# Altium PCB uku20710_proc_mount.PcbDoc (part 3 of 3)
Units mm, origin at the board's own origin, x right, y up, seen from the top; angles counter-clockwise.
Board outline 354.7 x 156.7 mm, 4 copper layers (Top Layer, MidLayer1, MidLayer2, Bottom Layer); 269 components, 535 nets, 989 pads, 687 vias.
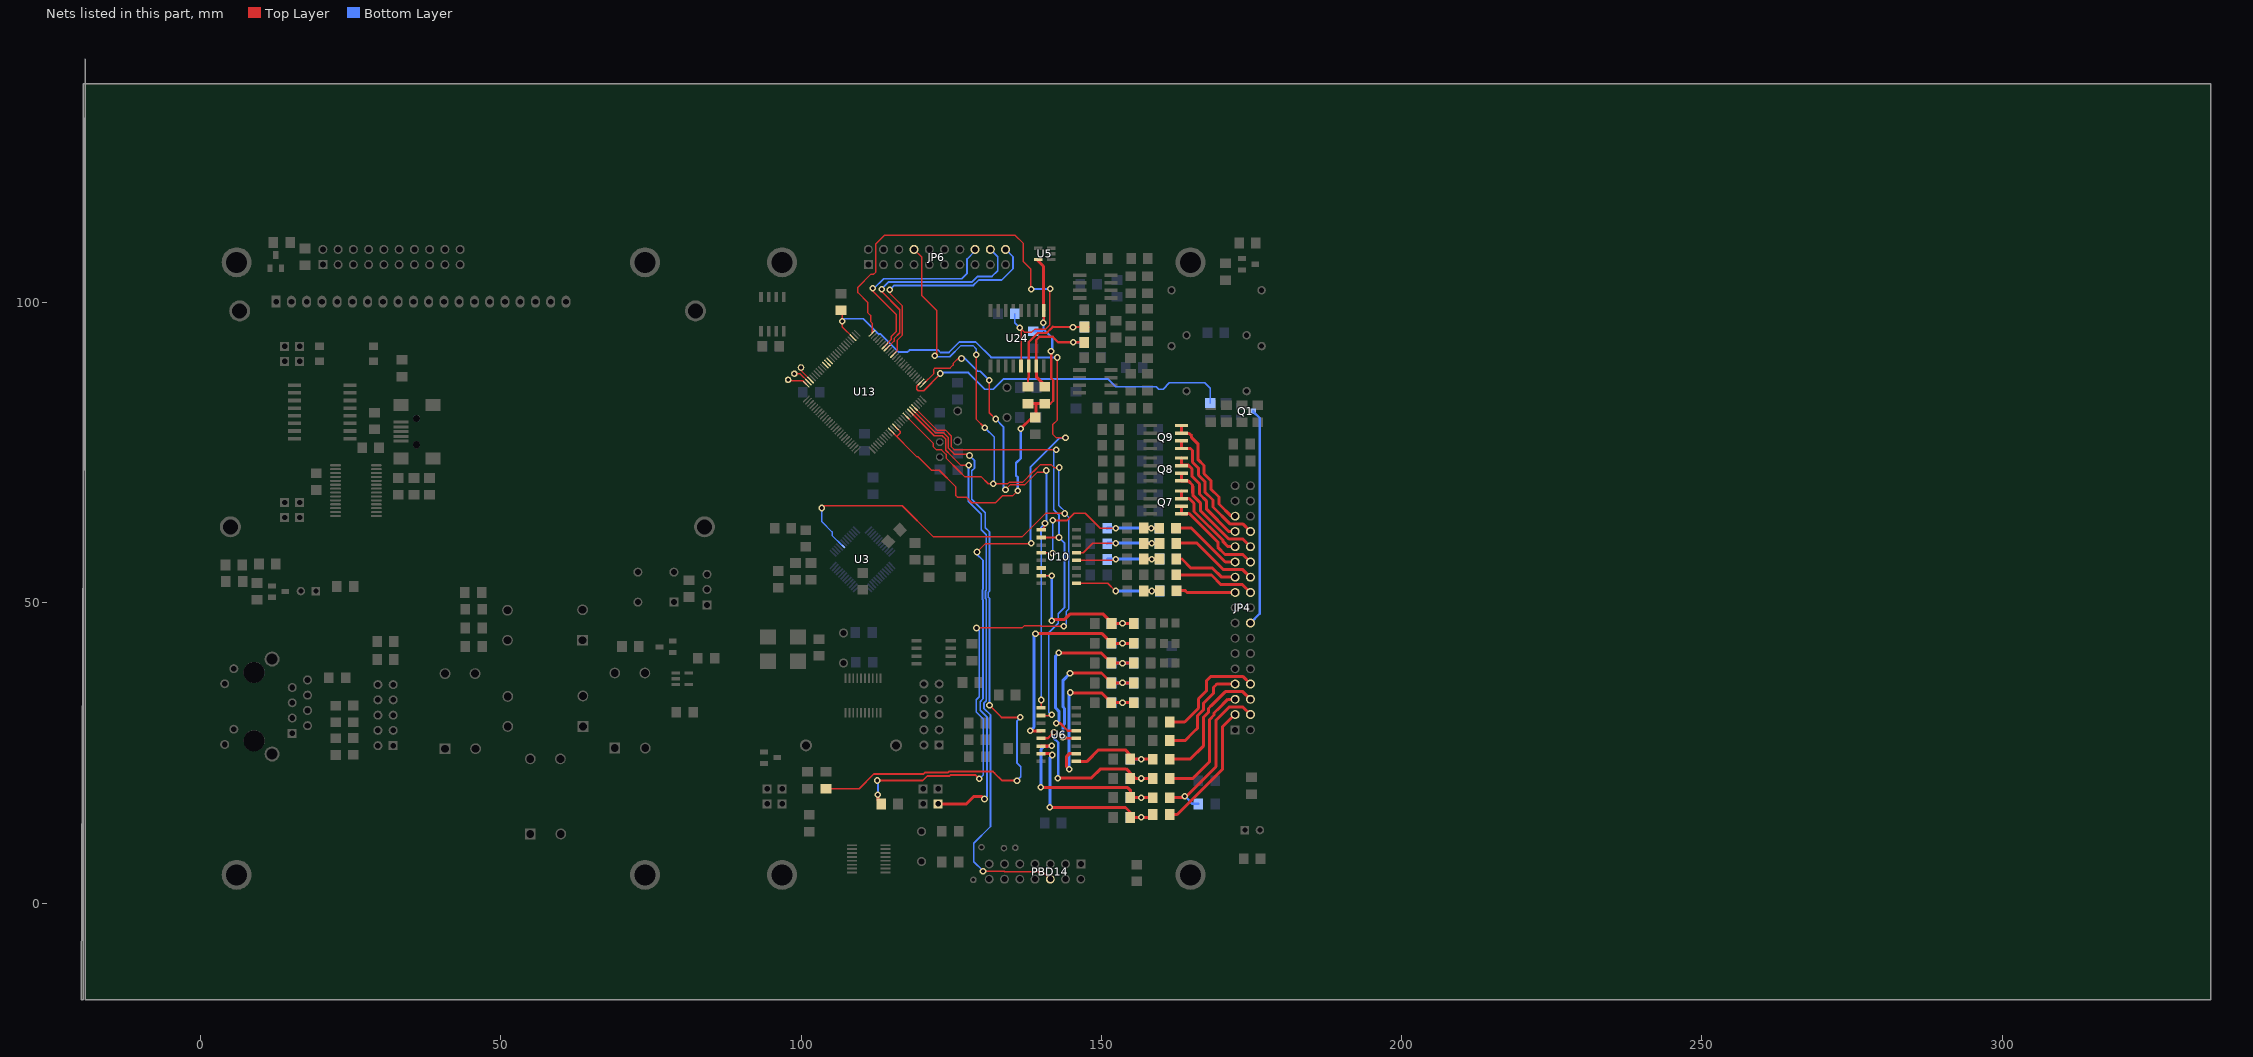
[diagram p3: the nets of this part, all layers, seen from the top]

## Via types
v1: diameter 1.1, hole 0.6, Top Layer to Bottom Layer, 508 vias
v2: diameter 1.1, hole 0.7, Top Layer to Bottom Layer, 105 vias
v3: diameter 1.2, hole 0.7, Top Layer to Bottom Layer, 58 vias
v4: diameter 1.5, hole 1, Top Layer to Bottom Layer, 12 vias
v5: diameter 1.27, hole 0.711, Top Layer to Bottom Layer, 3 vias
v6: diameter 1.2, hole 0.6, Top Layer to Bottom Layer, 1 vias

## Nets (pads, with @x,y where several pads share a name; then routed paths per layer and width w, separated by ;. In a path a pad name is that pad's centre, name@x,y a point inside that pad or via, vN(x,y) a via of type N, cw(c..) or ccw(c..) an arc to the next point about the centre after c; other vN are vias at no path point) (continued)
P1_25: JP6.19 U13.39 | length 29.9
  Top Layer w0.3: U13.39@115.701,90.984 116.974,92.257 v1(116.952,93.372) ; v1(123.904,93.172) 125.124,93.172 126.274,94.323 126.274,101.85 128.674,104.25 131.984,104.25 JP6.19@134.034,106.3
  Bottom Layer w0.3: v1(116.952,93.372) 123.704,93.372 v1(123.904,93.172)
P1_25: 
P1_25: 
P1_25: 
P1_25: 
P1_25: 
P1_26: JP6.20 U13.40 | length 38
  Top Layer w0.25: v1(114.774,102.15) 114.774,101.5 116.874,99.4 116.874,94.6 116.024,93.75 116.024,92.014 U13.40@115.347,91.337
  Bottom Layer w0.3: v1(114.774,102.15) 115.474,102.85 128.674,102.85 129.574,103.75 133.374,103.75 135.274,105.65 135.274,107.6 JP6.20@134.034,108.84
P1_27: JP6.18 U13.43 | length 36.9
  Top Layer w0.25: v1@113.324,101.9 116.424,98.8 116.424,94.95 115.474,94 115.474,93.586 U13.43@114.287,92.398 ; U13.43@114.124,92.25 U13.43@114.28,92.405
  Bottom Layer w0.3: v1@113.324,101.9 113.324,102.176 113.324,102.2 113.351,102.227 114.524,103.4 128.424,103.4 129.374,104.35 131.774,104.35 132.724,105.3 132.724,107.61 JP6.18@131.494,108.84
  other v1: 113.403,102.176
P1_28: JP6.16 U13.44 | length 33.2
  Top Layer w0.25: v1@111.874,102.1 111.874,101.95 115.874,97.95 115.874,95.2 115.804,95.13 115.804,95.122 115.002,94.319 115.002,93.82 U13.44@113.933,92.751
  Bottom Layer w0.3: v1@111.874,102.1 112.05,102.276 113.724,103.95 126.724,103.95 127.624,104.85 127.624,107.25 128.954,108.58 JP6.16@128.954,108.84
  other v1: 111.951,102.375
P1_29: JP6.14 U13.45 | length 31.9
  Top Layer w0.25: v1@110.3,102.375 110.3,102.225 110.526,102 112.501,100.024 112.701,100.024 115.352,97.373 115.352,95.323 114.552,94.523 114.552,94.077 U13.45@113.58,93.105
  Bottom Layer w0.3: v1@110.501,102.375 112.901,104.775 124.204,104.775 125.104,105.675 125.104,107.276 126.414,108.586 JP6.14@126.414,108.84
  other v1: 110.601,102.075
P1_29: 
P1_29: 
P1_29: 
P1_29: 
P1_30: U6.10 U10.10 U13.21 | length 78.8
  Top Layer w0.25: U13.21@118.883,82.498 122.631,78.75 124.024,78.75 124.974,77.8 124.974,76 125.474,75.5 v1(142.474,75.5) ; U6.10@139.954,31.218 139.972,31.2 141.702,31.2 v1@141.76,31.258
  Top Layer w0.3: U10.10@139.999,60.875 v1@142.95,60.875
  Bottom Layer w0.3: v1@141.76,31.258 141.224,31.793 141.224,44.976 142.81,46.562 142.81,48.198 143.874,49.262 143.874,59.901 v1@142.96,60.815 ; v1(142.474,75.5) 142.074,75.1 142.074,65.502 142.924,64.652 v1@142.924,60.815
  other v1: 141.76,31.358 142.935,60.875
P1_31: 
P1_31: 
P1_31: 
P1_31: 
P1_31: 
P1_31: 
P1_31: 
P1_31: 
P1_31: 
P1_31: 
P1_31: 
P1_31: 
P1_31: 
P1_31: R22.1 U13.20 | length 108.1
  Top Layer w0.25: U13.20@118.529,82.145 122.405,78.27 123.755,78.27 124.505,77.519 124.505,75.769 125.557,74.718 127.832,74.718 v1(128.032,74.518)
  Top Layer w0.3: R22.1@104.133,19.042 109.666,19.042 112.129,21.505 120.43,21.505 120.68,21.755 124.481,21.755 124.631,21.906 131.933,21.906 132.183,21.655 ; v1(131.357,32.908) 133.358,30.908 v1(136.508,30.908) ; 132.183,21.655 133.457,20.381 v1(135.934,20.381)
  Bottom Layer w0.3: v1(128.032,74.518) 128.882,73.667 128.882,72.443 128.406,71.967 128.406,67.217 130.657,64.966 130.657,62.516 131.357,61.815 131.357,51.963 131.157,51.763 131.157,50.913 131.357,50.713 v1(131.357,32.908) ; v1(135.934,20.381) 136.558,21.005 136.558,22.706 135.958,23.306 135.958,30.358 v1(136.508,30.908)
P2_0: U13.75 X13.1 | length 3.3
  Top Layer w0.25: X13.1@97.825,87.121 97.975,86.971 100.268,86.971 U13.75@100.852,86.387
P2_1: U13.74 X14.1 | length 2.9
  Top Layer w0.25: X14.1@98.875,88.15 99.797,88.15 U13.74@101.205,86.741
P2_2: U13.73 X15.1 | length 2.7
  Top Layer w0.25: X15.1@99.972,89.171 99.972,88.682 U13.73@101.559,87.095
P2_7: U13.66
P2_8: U13.65
P2_9: U13.64
P2_10: R9.2 U13.53 X20.1 | length 142.3
  Top Layer w0.25: R9.2@106.7,98.724 106.874,98.549 v1(106.874,96.9) 106.824,96.85 106.824,95.971 U13.53@108.63,94.166 ; v1(129.274,58.45) 130.624,59.8 v1@138.274,59.8 ; v1(142.674,90.85) 142.674,80.45 141.874,79.65 141.874,78.1 142.524,77.45 v1(144.024,77.45)
  Top Layer w0.5: X20.1@122.822,16.5 127.502,16.5 128.706,17.704 130.107,17.704 v3(130.507,17.304)
  Bottom Layer w0.3: v1(106.874,96.9) 107.274,97.3 110.324,97.3 112.851,94.773 113.201,94.773 116.202,91.772 117.752,91.772 118.052,92.072 122.804,92.072 123.204,91.672 124.604,91.672 126.355,93.422 129.055,93.422 131.628,90.85 v1(142.674,90.85) ; v1(129.274,58.45) 129.274,58.05 130.274,57.05 130.274,52.238 130.197,52.161 130.197,50.515 130.274,50.438 130.274,34 129.824,33.55 129.824,32.1 130.924,31 130.924,17.722 v3(130.507,17.304) ; v1@138.274,59.8 138.174,59.9 138.174,72.55 143.074,77.45 v1(144.024,77.45)
  other v1: 138.309,59.915
P2_13: R97.1 U13.50 U24.5 | length 74.9
  Top Layer w0.25: U13.50@111.812,94.873 111.812,96.565 111.552,96.824 111.552,97.847 111.124,98.275 111.124,99.975 109.452,101.648 109.452,102.55 111.628,104.726 112.102,104.726 112.452,105.076 112.452,109.778 113.853,111.178 135.658,111.178 137.009,109.828 137.009,106.777 138.259,105.526 v1@138.259,102.276 ; v1(136.408,95.824) v1@136.609,95.623 ; U24.5@136.609,89.425 v1@136.609,95.623 ; v1(141.46,102.276) 141.36,102.176 141.36,96.224 140.659,95.524 138.859,95.524 138.409,95.074 137.159,95.074 v1@136.609,95.623
  Bottom Layer w0.3: R97.1@135.57,98.118 135.57,96.662 v1(136.408,95.824) ; v1(138.309,102.226) v1@141.41,102.226
P3_25: R84.1 U13.27 | length 57.5
  Top Layer w0.25: U13.27@119.944,86.741 119.254,86.051 119.254,85.571 119.504,85.321 120.404,85.321 123.155,88.072 v1(123.155,88.172)
  Bottom Layer w0.3: v1(123.155,88.172) 123.305,88.322 127.856,88.322 130.607,85.571 132.007,85.571 133.708,87.272 151.062,87.272 152.362,85.972 159.164,85.972 159.564,85.571 160.264,85.571 161.315,86.622 167.216,86.622 168.113,85.725 R84.1@168.113,83.268
P3_26: U6.9 U10.9 U13.26 | length 84.3
  Top Layer w0.25: U13.26@120.297,86.387 122.103,88.194 122.103,88.921 122.253,89.071 124.804,89.071 125.304,89.571 125.304,89.821 126.355,90.872 126.705,90.872 v1@126.905,90.872 ; v1(131.324,87.05) 131.324,81.65 v1(132.374,80.6) ; v1@133.89,68.85 v1(134.024,68.85) 134.791,69.616 137.185,69.616 139.335,71.767 v1@140.835,71.767 ; U6.9@139.954,32.488 139.954,33.48 v1@139.974,33.5 ; U10.9@139.999,62.145 140.609,62.755 v1(140.609,63.216)
  Bottom Layer w0.3: v1@126.905,90.872 127.053,90.872 129.374,88.55 129.824,88.55 v1(131.324,87.05) ; v1(132.374,80.6) 133.674,79.3 133.674,69.05 133.949,68.775 v1@134.074,68.65 ; 139.959,61.315 139.959,62.566 140.835,63.442 v1@140.835,71.767 ; v1@139.974,33.5 139.974,33.808 139.974,61.9
  other v1: 140.009,33.808 140.835,72.017 126.705,90.672
PB1: 
PB1: 
PB2: 
PB2: 
PB3: 
PB3: 
PE6: 
PE6: 
PE7: 
PQ3: 
PQ4: 
PQ5: 
PQ6: 
PROG0: 
PROG1: 
PROG1: 
PROG1: 
PWM1: 
PWM2: 
REL1: 
REL1: JP4.24 Q7.5 Q7.6 | length 17.1
  Top Layer w0.5: Q7.6@163.336,66.07 Q7.5@163.336,64.8 163.336,64.788 Q7.5@164.236,64.788 ; Q7.5@163.824,64.9 163.824,64.85 164.624,64.85 169.374,60.1 169.374,59.25 170.574,58.05 173.554,58.05 JP4.24@174.814,56.79
REL2: JP4.25 Q7.7 Q7.8 | length 14.4
  Top Layer w0.5: Q7.8@163.336,68.61 Q7.7@163.336,67.34 163.348,67.35 164.624,67.35 165.424,66.55 165.424,65.2 170.274,60.35 170.274,60.15 171.094,59.33 JP4.25@172.274,59.33
REL3: JP4.26 Q8.5 Q8.6 | length 20.1
  Top Layer w0.5: Q8.6@163.324,71.565 Q8.5@163.324,70.295 163.327,70.297 163.374,70.25 164.524,70.25 165.174,69.6 165.174,68.3 ; 165.224,69.4 165.224,67.9 166.474,66.65 166.474,65.35 171.224,60.6 173.544,60.6 JP4.26@174.814,59.33
REL4: JP4.27 Q8.7 Q8.8 | length 17.3
  Top Layer w0.5: Q8.8@163.324,74.105 Q8.7@163.324,72.835 163.389,72.9 164.474,72.9 165.074,72.3 165.074,71.05 166.324,69.8 166.324,68.1 167.524,66.9 167.524,65.55 171.204,61.87 JP4.27@172.274,61.87
REL5: JP4.28 Q9.5 Q9.6 | length 22
  Top Layer w0.5: Q9.5@163.324,75.695 Q9.5@163.324,75.7 ; Q9.6@163.324,76.965 Q9.5@163.324,75.7 ; JP4.28@174.814,61.87 173.534,63.15 171.374,63.15 168.574,65.95 168.574,67.1 167.224,68.45 167.224,70.2 166.174,71.25 166.174,72.4 165.174,73.4 165.174,75.35 164.824,75.7 Q9.5@163.324,75.7
REL6: JP4.29 Q9.7 Q9.8 | length 20
  Top Layer w0.5: Q9.8@163.324,79.505 Q9.7@163.324,78.235 163.317,78.242 163.274,78.2 163.324,78.2 164.624,78.2 165.024,77.8 165.024,77.5 166.124,76.4 166.124,73.8 167.074,72.85 167.074,71.5 168.224,70.35 168.224,68.95 169.574,67.6 169.574,66.45 171.614,64.41 JP4.29@172.274,64.41
REL7: JP4.16 Q1.3 | length 36.3
  Bottom Layer w0.4: JP4.16@174.814,46.63 176.368,48.184 176.368,80.77 Q1.3@175.268,81.871
RES: D1.1 JP6.8 U3.29 U13.17 | length 225.8
  Top Layer w0.25: v1(103.452,65.785) 103.852,66.185 ; v1@103.814,66.147 116.822,66.147 121.955,61.015 136.84,61.015 140.691,64.866 v1@143.96,64.866 ; U13.17@117.469,81.084 122.024,76.528 122.024,75.95 122.524,75.45 123.374,75.45 124.124,74.7 124.124,74.1 126.337,71.888 127.207,71.018 129.939,71.018 131.14,69.817 v1(131.957,69.817) ; JP6.8@118.794,108.84 120.074,107.56 120.074,101.15 122.574,98.65 v1@122.574,91.25 ; v1(129.124,91.3) 129.124,80.6 v1(130.574,79.15) ; v3(129.207,45.8) v3@129.307,45.8 ; v3@129.318,45.811 130.407,45.811 ; 130.407,45.8 136.774,45.8 137.174,46.2 139.824,46.2 139.974,46.05 v1@143.76,46.05 ; v1@131.774,69.8 134.366,69.8 134.613,70.046 136.856,70.046 138.731,71.921 ; 138.735,71.917 139.834,73.016 141.587,73.016 142.085,72.518 v1(143.01,72.518)
  Top Layer w0.3: v1(112.678,20.404) 120.229,20.404 120.98,21.155 124.731,21.155 124.88,21.304 129.083,21.304 v1(129.683,20.704)
  Top Layer w0.5: v1(112.778,18.053) 112.778,17.067 D1.1@113.334,16.512
  Bottom Layer w0.25: v1(103.452,65.785) 103.452,63.485 105.152,61.785 105.152,61.223 U3.29@106.731,59.644 ; v1(122.253,91.122) 122.404,90.972 124.754,90.972 126.605,92.822 128.605,92.822 129.124,92.303 v1(129.124,91.3) v1@129.074,91.25 ; v3(129.207,45.8) 129.657,45.35 129.657,34.359 129.157,33.858 129.157,31.808 130.307,30.658 130.307,21.804 130.307,21.328 v1(129.683,20.704) ; v1(130.574,79.15) 132.174,77.55 132.174,69.95 v1@132.024,69.8 ; 142.924,66.167 142.924,72.433 v1(143.01,72.518) ; 142.96,66.167 143.924,65.202 v1(143.924,64.866) 144.524,64.266 144.524,48.926 144.11,48.512 144.11,46.412 v1(143.76,46.061)
  Bottom Layer w0.3: v1(112.678,20.404) 112.778,20.304 v1(112.778,18.053)
RX: 
RXCAN: 
SK1: JP4.23 R43.1 | length 12.2
  Top Layer w0.5: R43.1@162.434,62.416 R43.1@162.427,62.422 165.009,62.422 170.641,56.79 JP4.23@172.274,56.79
SK2: JP4.22 R45.1 | length 14.7
  Top Layer w0.5: R45.1@162.465,59.915 165.916,59.915 170.317,55.514 173.551,55.514 JP4.22@174.814,54.25
SK3: JP4.21 R49.1 | length 11
  Top Layer w0.5: R49.1@162.477,57.271 163.409,57.271 164.916,55.764 168.516,55.764 170.03,54.25 JP4.21@172.274,54.25
SK4: JP4.20 R51.1 | length 13.6
  Top Layer w0.5: R51.1@162.465,54.614 168.316,54.614 169.917,53.013 173.511,53.013 JP4.20@174.814,51.71
T3: 
T3: 
TD1: 
TX: 
U2: U10.14
U5: 
U6: 
U7: 
U8: 
UAKB: 
UB1: JP4.3 R25.2 | length 21.9
  Top Layer w0.5: R25.2@161.362,14.746 162.62,14.746 170.124,22.25 170.124,29.3 172.214,31.39 JP4.3@172.274,31.39
UB2: JP4.5 R29.2 | length 20.7
  Top Layer w0.5: R29.2@161.362,20.743 165.218,20.743 168.024,23.55 168.024,30.566 168.767,31.308 168.767,31.658 169.317,32.208 ; 169.325,32.2 171.054,33.93 JP4.5@172.274,33.93
UBM1: JP4.4 R27.2 R102.1 | length 27.6
  Top Layer w0.5: R27.2@161.362,17.543 163.918,17.543 169.074,22.7 169.074,30.45 171.274,32.65 173.554,32.65 JP4.4@174.814,31.39
  Bottom Layer w0.4: v1(163.871,17.804) 165.165,16.511 R102.1@166.13,16.511
UBM2: JP4.6 R33.2 | length 21.8
  Top Layer w0.5: R33.2@161.362,23.943 164.768,23.943 167.024,26.2 167.024,30.966 167.816,31.758 167.816,32.408 168.266,32.858 ; 168.274,32.85 170.624,35.2 173.544,35.2 JP4.6@174.814,33.93
UIB1: C65.2 R122.2 R126.1 U24.7 | length 19
  Top Layer w0.4: U24.7@139.149,89.271 U24.7@139.149,89.425 139.149,93.764 139.658,94.273 141.908,94.273 142.824,93.357 v1(145.311,93.357) R122.2@147.137,93.357
  Top Layer w0.5: U24.7@139.149,89.425 139.149,87.625 140.568,86.207 R126.1@140.568,85.962
  Bottom Layer w0.4: v1(145.311,93.357) 145.327,93.373 147.172,93.373 C65.2@147.211,93.373
UIB2: C16.2 R62.2 R66.1 U24.6 | length 21
  Top Layer w0.4: R66.1@137.768,85.962 137.768,87.393 137.879,87.505 U24.6@137.879,89.425 137.879,93.394 139.408,94.923 140.858,94.923 141.408,95.473 ; 141.428,95.453 141.924,95.95 145.261,95.924 147.187,95.903 147.771,95.903 R62.2@147.824,95.85
  Bottom Layer w0.4: v1@145.261,95.924 C16.2@147.122,95.903 C16.2@147.722,95.903
  other v1: 145.261,95.874
ULOAD: JP4.19 R36.2 | length 9.9
  Top Layer w0.5: R36.2@162.502,52.006 163.972,52.006 164.268,51.71 JP4.19@172.274,51.71
US: JP4.7 R41.2 | length 17.3
  Top Layer w0.5: R41.2@161.362,27.043 163.918,27.043 165.253,28.378 166.024,29.15 166.024,31.216 166.966,32.158 166.966,33.208 168.666,34.909 168.666,35.909 168.992,36.234 169.228,36.47 JP4.7@172.274,36.47 ; 168.967,36.259 168.972,36.254 168.972,36.214
US1: 
US1: 
US1: 
US1: 
US1: 
US1: 
US1: 
US1: 
US1: 
UU1: C4.1 R24.1 R25.1 U6.15 | length 31.9
  Top Layer w0.5: U6.15@139.954,24.868 139.924,24.9 139.954,24.9 141.566,24.9 v1(141.81,24.656) ; v1(141.424,15.95) 141.474,15.9 154.017,15.9 154.763,15.154 154.763,14.257 154.763,14.243 154.787,14.243 156.663,14.243 v1@157.112,14.243 ; v1@156.363,14.203 156.663,14.203 158.02,14.203 R25.1@158.562,14.746
  Bottom Layer w0.4: C4.1@154.772,14.25 C4.1@155.374,14.25 ; C4.1@155.263,14.203 v1@156.36,14.203
  Bottom Layer w0.5: v1(141.424,15.95) 141.424,24.271 v1(141.81,24.656)
  other v1: 156.663,14.253
UU2: C5.1 R26.1 R27.1 U6.14 | length 33.6
  Top Layer w0.5: v1(139.924,19.25) 139.974,19.2 154.368,19.2 154.863,18.705 154.863,17.557 154.863,17.554 154.874,17.543 156.663,17.543 R27.1@158.562,17.543 ; 141.024,26.1 139.992,26.1 U6.14@139.954,26.138 141.641,26.138 v1(141.71,26.206)
  Bottom Layer w0.4: C5.1@154.772,17.552 155.272,17.552 C5.1@155.274,17.55
  Bottom Layer w0.5: v1(139.924,19.25) 139.924,25.6 140.424,26.1 141.603,26.1 v1(141.71,26.206) ; C5.1@154.863,17.552 155.272,17.552 156.661,17.552 v1(156.663,17.55)
UU3: C6.1 R28.1 R29.1 U6.13 | length 30
  Top Layer w0.4: U6.13@139.954,27.408 141.061,27.408 v1(142.11,28.457)
  Top Layer w0.5: v1(142.724,20.8) 148.324,20.8 149.874,22.35 154.118,22.35 155.249,21.219 155.725,20.743 v1(156.663,20.743) R29.1@158.562,20.743
  Bottom Layer w0.4: v1(142.11,28.457) 142.11,27.407 142.81,26.707 142.81,20.886 v1(142.724,20.8) ; C6.1@154.772,20.75 155.224,20.75 C6.1@155.23,20.755 ; C6.1@154.963,20.755 C6.1@155.23,20.755 ; C6.1@155.274,20.8 C6.1@155.23,20.755 ; v1@156.66,20.755 C6.1@155.23,20.755
  Bottom Layer w0.5: v1@142.674,20.85 v1(142.724,20.8)
UU4: C7.1 R32.1 R33.1 U6.1 | length 17.4
  Top Layer w0.5: U6.1@145.804,23.598 145.804,23.6 147.624,23.6 149.524,25.5 153.969,25.5 R32.1@154.813,24.656 ; R32.1@154.963,23.956 156.657,23.956 v1(156.663,23.95) ; R32.1@155.018,24.188 R32.1@155.107,24.1 ; v1@156.663,23.943 R33.1@158.562,23.943
  Bottom Layer w0.4: C7.1@154.772,23.95 C7.1@155.274,23.95 ; C7.1@154.787,23.957 156.657,23.957 v1(156.663,23.95) ; C7.1@155.213,23.956 v1@156.31,23.956
UU5: C9.1 D6.2 R47.2 R48.2 U6.2 | length 33
  Top Layer w0.5: v1(144.66,22.255) 144.21,22.706 144.21,24.436 144.624,24.85 144.642,24.868 U6.2@145.804,24.868 ; v1(144.824,35.05) 144.874,35 150.005,35 R48.2@151.662,33.343 151.675,33.357 v1(153.513,33.357) R47.2@155.37,33.359
  Bottom Layer w0.5: v1@144.624,22.255 144.624,34.85 v1(144.824,35.05) ; C9.1@151.675,33.35 151.681,33.357 v1(153.513,33.357) D6.2@155.37,33.359 154.37,33.359
UU6: C10.1 D7.2 R54.2 R55.2 U6.4 | length 29.6
  Top Layer w0.4: v6@143.61,27.657 143.61,27.607 143.809,27.408 U6.4@145.804,27.408
  Top Layer w0.5: v1(144.774,38.25) 144.824,38.3 150.005,38.3 R55.2@151.662,36.643 151.675,36.657 153.513,36.657 R54.2@155.37,36.659
  Bottom Layer w0.5: v6@143.624,27.657 143.624,29.607 143.86,29.843 143.86,32.408 143.624,32.644 143.624,37.1 v1(144.774,38.25) ; C10.1@151.662,36.643 151.672,36.644 151.675,36.644 151.774,36.65 v1(153.513,36.65) D7.2@155.37,36.659 154.37,36.659
  other v6: 143.56,27.657
UU7: C13.1 D8.2 R58.2 R59.2 U6.5 | length 34.1
  Top Layer w0.4: v1(142.51,29.957) 143.11,29.957 144.39,28.678 U6.5@145.804,28.678
  Top Layer w0.5: v1(142.874,41.65) 142.924,41.6 150.019,41.6 R59.2@151.669,39.95 ; 154.387,39.957 155.374,39.95 v1(153.513,39.95) R59.2@151.669,39.95 ; R59.2@151.669,39.95 R59.2@151.662,39.943 R59.2@151.669,39.95
  Bottom Layer w0.5: v1(142.51,29.957) 142.96,30.408 142.96,31.872 142.374,32.458 142.374,41.15 v1(142.874,41.65) ; C13.1@151.679,39.952 151.681,39.95 v1(153.513,39.95) D8.2@155.374,39.95
UU8: C24.1 D9.2 R68.2 R70.2 U6.12 | length 40.2
  Top Layer w0.5: v1(138.159,28.657) 139.926,28.657 U6.12@139.947,28.678 ; v1(139.024,44.85) 150.124,44.85 151.697,43.278 151.724,43.25 R70.2@151.679,43.252 ; U6.12@139.924,28.7 U6.12@139.947,28.678 ; U6.12@139.954,28.678 U6.12@139.947,28.678 ; R70.2@151.662,43.243 153.018,43.243 153.024,43.25 v1(153.513,43.25) 155.374,43.25 154.387,43.257
  Bottom Layer w0.5: v1(138.159,28.657) 138.774,29.273 138.774,44.6 v1(139.024,44.85) ; C24.1@151.679,43.252 151.681,43.25 v1(153.513,43.25) D9.2@155.363,43.261
UU9: C8.1 R35.1 R36.1 U10.1 | length 17.1
  Top Layer w0.25: U10.1@145.849,53.255 151.07,53.255 v1(152.362,51.963)
  Top Layer w0.5: R35.1@157.076,51.92 157.119,51.963 v1(158.414,51.963) 158.457,52.006 R36.1@159.702,52.006
  Bottom Layer w0.5: v1(152.362,51.963) 152.366,51.96 C8.1@159.717,51.96 ; v1@158.414,51.96 v1(158.414,51.963)
UU10: C40.1 D13.2 R51.2 R111.2 U10.2 | length 17.6
  Top Layer w0.3: U10.2@145.911,54.514 152.212,54.514 v1(152.362,54.664)
  Top Layer w0.5: D13.2@157.07,54.67 157.064,54.664 R51.2@159.614,54.664
  Bottom Layer w0.5: R111.2@151.012,54.664 C40.1@159.564,54.664
  other v1: 158.364,54.664
UU10: 
UU11: C38.1 D4.2 R49.2 R118.2 U10.4 | length 18
  Top Layer w0.3: U10.4@145.849,57.065 145.85,57.064 152.162,57.064 v1(152.362,57.264)
  Top Layer w0.5: D4.2@157.068,57.273 R49.2@159.705,57.273 ; v1(158.364,57.264) v1@158.364,57.273
  Bottom Layer w0.5: R118.2@150.962,57.221 151.005,57.264 C38.1@159.664,57.264
UU12: C39.1 D12.2 R45.2 R129.2 U10.5 | length 18.6
  Top Layer w0.3: U10.5@145.849,58.335 146.982,58.335 148.561,59.915 v1(152.362,59.915)
  Top Layer w0.5: D12.2@157.068,59.874 159.605,59.874 R45.2@159.664,59.815 ; v1@158.364,59.874 v1(158.364,59.915)
  Bottom Layer w0.5: R129.2@150.962,59.865 151.012,59.915 C39.1@159.664,59.915
UU13: C37.1 D3.2 R43.2 R128.2 U10.12 | length 29.9
  Top Layer w0.3: U10.12@139.999,58.335 141.789,58.335 v1(141.86,58.265) ; v1(141.91,63.716) 144.287,63.716 145.487,64.915 147.312,64.915 149.805,62.422 v1(152.362,62.422)
  Top Layer w0.5: D3.2@157.12,62.422 R43.2@159.627,62.422
  Bottom Layer w0.3: v1(141.86,58.265) 141.91,58.315 v1(141.91,63.716)
  Bottom Layer w0.5: R128.2@150.962,62.407 150.977,62.422 C37.1@159.007,62.422
  other v1: 158.314,62.422
UU14: C26.1 D10.2 R75.2 R76.2 U10.15 | length 27.7
  Top Layer w0.25: U10.15@139.999,54.525 141.698,54.525 v1(141.724,54.499)
  Top Layer w0.5: v1(141.724,47) 141.974,47.25 143.886,47.25 144.736,48.1 150.324,48.1 151.774,46.65 151.865,46.559 153.024,46.559 153.033,46.55 153.513,46.55 R75.2@155.37,46.559
  Bottom Layer w0.4: v1(141.724,47) v1(141.724,54.499)
  Bottom Layer w0.5: C26.1@151.675,46.55 151.683,46.559 v1(153.513,46.559) D10.2@155.37,46.559
VBAT: PBD14.6 U13.19 | length 97.7
  Top Layer w0.25: U13.19@118.176,81.791 122.148,77.819 123.505,77.819 124.074,77.25 124.074,75.4 124.976,74.499 126.557,72.917 v1(127.932,72.917) ; v1(130.274,5.3) 133.809,5.3 133.908,5.201 140.24,5.201 PBD14.6@141.481,3.96
  Bottom Layer w0.3: v1(127.932,72.917) 127.856,72.841 127.856,66.914 130.005,64.765 130.005,62.164 130.824,61.345 130.824,52.109 130.677,51.962 130.677,50.714 130.824,50.566 130.824,33.7 130.424,33.3 130.424,32.45 131.524,31.35 131.524,12.743 128.732,9.951 128.732,6.892 130.274,5.35 v1(130.274,5.3)
VREF: C20.2 C25.2 R66.2 R126.2 U5.5 U13.10 U13.12 U24.9 | length 77.6
  Top Layer w0.25: U13.10@114.994,78.609 119.308,74.296 119.493,74.296 121.721,72.068 123.006,72.068 125.724,69.35 125.724,67.9 126.024,67.6 127.474,67.6 128.424,66.65 132.374,66.65 133.574,67.85 135.274,67.85 v1(136.074,68.65) ; U13.12@115.701,79.316 116.524,78.493 116.524,78.3 115.924,77.7
  Top Layer w0.4: R66.2@137.724,83.15 137.737,83.162 R66.2@137.768,83.162 R66.2@137.774,83.162 ; U24.9@140.419,98.675 140.419,97.155 140.424,97.15 ; R126.2@140.624,83.15 141.474,83.15 141.974,83.65 141.974,87.05 141.674,87.35 141.674,91.873 v1@141.674,91.95
  Top Layer w0.5: v1(136.574,79) 138.427,80.853 C25.2@138.971,80.853 ; R66.2@137.774,83.1 137.802,83.128 137.837,83.162 139.024,83.162 ; C25.2@139.074,80.8 139.074,80.853 139.074,83.112 139.024,83.162 ; U5.5@139.249,107.15 139.366,107.033 140.374,106.025 140.374,98.675 140.374,98.65 140.394,98.65 U24.9@140.419,98.675 ; R126.2@140.568,83.162 139.024,83.162
  Bottom Layer w0.3: 140.324,97.25 140.424,97.15
  Bottom Layer w0.4: v1(136.074,68.65) 136.074,70.9 135.774,71.2 135.774,73.25 136.574,74.05 v1(136.574,79) ; C20.2@138.662,95.206 140.091,95.206 140.384,95.499 ; v1@140.359,96.624 140.359,96.6 140.359,95.524 140.384,95.499 ; 140.409,95.524 140.384,95.499 ; v1@140.424,96.6 140.424,97.15 ; v1@141.674,91.95 141.81,92.085 141.81,94.074 140.384,95.499
  other v1: 141.61,91.873 140.324,96.6
VS: 
VS: JP4.8 R71.2 | length 19
  Top Layer w0.5: R71.2@161.362,30.143 163.868,30.143 166.17,32.445 166.17,34.012 167.466,35.309 167.466,36.959 168.257,37.75 173.534,37.75 JP4.8@174.814,36.47
pads on no net: 1mkFx16.1 1mkFx16.2 51R.1 51R.2 100R.1 100R.2 C1_1.1 C1_1.2 C2_1.1 C2_1.2 C3_1.1 C3_1.2 C4_1.1 C4_1.2 C5_1.1 C5_1.2 C22_1.1 C22_1.2 D1_1.1 D1_1.2 D3_1.1 D3_1.2 DS1.1 DS1.2 J1.0 J1.1 J1.2 J1.3 J1.4 J1.5 J1.6 J0011D21B.0 J0011D21B.1 J0011D21B.2 J0011D21B.3 J0011D21B.4 J0011D21B.5 J0011D21B.6 J0011D21B.7 J0011D21B.8 J0011D21B.9 J0011D21B.10 J0011D21B.11 J0011D21B.12 JP4.30 JP5.1 JP5.2 JP5.3 JP5.4 JP5.5 JP5.6 JP5.7 JP5.8 JP5.9 JP5.10 JP5.11 JP5.12 JP5.13 JP5.14 JP5.15 JP5.16 JP5.17 JP5.18 JP5.19 JP5.20 JP6.10 JP9.1 JP9.2 JP9.3 PBD10.9 PBD10.10 PLHD10.1 PLHD10.2 PLHD10.3 PLHD10.4 PLHD10.5 PLHD10.6 PLHD10.7 PLHD10.8 PLHD10.9 PLHD10.10 Q1_1.1 Q1_1.2 Q1_1.3 Q3.1 Q3.2 Q3.3 Q5.1 Q5.2 Q5.3 R1_1.1 R1_1.2 R2.1 R2.2 R3.1 R3.2 R4.1 R4.2 R5.1 R5.2 R6.1 R6.2 R7.1 R7.2 R8.1 R8.2 R9_1.1 R9_1.2 R10_1.1 R10_1.2 R11.1 R11.2 R12_1.1 R12_1.2 R13_1.1 R13_1.2 R21.1 R21.2 S1.1 S1.2 S2.1 S2.2 S3.1 S3.2 S4.1 S4.2 S5.1 S5.2 S6.1 S6.2 U1.7 U1.11 U1_1.1 U1_1.2 U1_1.3 U1_1.4 U1_1.5 U1_1.6 U1_1.7 U1_1.8 U1_1.9 U1_1.10 U1_1.11 U1_1.12 U1_1.13 U1_1.14 U1_1.15 U1_1.16 U1_1.17 U1_1.18 U1_1.19 U1_1.20 U2.1 U2.5 U2.8 U2_1.1 U2_1.2 U2_1.3 U2_1.4 U2_1.5 U2_1.6 U2_1.7 U2_1.8 U2_1.9 U2_1.10 U2_1.11 U2_1.12 U2_1.13 U2_1.14 U2_1.15 U2_1.16 U2_1.17 U2_1.18 U2_1.19 U2_1.20 U2_1.21 U2_1.22 U2_1.23 U2_1.24 U2_1.25 U2_1.26 U2_1.27 U2_1.28 U3.1 U3.5 U3.6 U3.8 U3.9 U3.10 U3.11 U3.12 U3.25 U3.33 U3.38 U3.42 U3.45 U3.46 U3_1.1 U3_1.2 U3_1.3 U3_1.4 U3_1.5 U3_1.6 U3_1.7 U3_1.8 U3_1.9 U3_1.10 U3_1.11 U3_1.12 U3_1.13 U3_1.14 U3_1.15 U3_1.16 U4.3 U4.4 U4.5 U4.6 U4.7 U4.11 U4.12 U4.13 U4.15 U4_1.1 U4_1.2 U4_1.3 U4_1.4 U4_1.5 U5.4 U5_1.1 U5_1.2 U5_1.3 U5_1.4 U9.1 U9.5 U9.8 U10.13 U11.5 U12.1 U13.1 U13.2 U13.3 U13.4 U13.5 U13.6 U13.14 U13.51 U13.52 U13.56 U13.67 U13.68 U13.69 U13.70 U13.82 U13.85 U13.100 U24.12 X1.1 X2.1 X3.1 X4.1 X5.1 X6.1 X7.1 X8.1
copper on no net: | length 2045.9
  Top Layer w0.3: v3(1.675,101.426) 2.275,102.026 9.65,102.026 10.375,101.301 10.375,99.401 11.225,98.551 33.852,98.551 35.433,100.132 ; v3(1.925,47.001) 2.575,46.351 40.625,46.351 40.925,46.051 43.819,46.051 44.062,45.808 ; v1@2.3,49.001 v1(2.25,48.951) 2.25,48.664 3.851,47.063 41.91,47.063 43.861,49.013 44.011,49.013 ; v1(2.75,95.601) 8,95.601 9.8,97.401 37.782,97.401 40.513,100.132 ; v1(2.786,56.415) 2.801,56.401 4.114,56.401 4.15,56.365 ; v1(3.15,101.101) 3.5,101.451 9.275,101.451 9.85,100.876 9.85,99.151 11,98.001 35.842,98.001 37.973,100.132 ; 3.975,26.351 3.975,32.376 5.522,33.923 ; 4.002,36.509 v3(4.002,42.628) ; v1(4.001,48.463) 4.701,47.763 39.41,47.763 43.348,51.701 44,51.701 ; 4.201,53.501 4.201,53.543 4.201,53.566 6.931,56.296 6.945,56.296 ; v3(5.325,44.126) 5.175,43.976 3.45,43.976 1.875,42.401 1.875,25.801 3.075,24.601 4.4,24.601 5.522,25.723 5.522,28.939 ; 5.522,39.019 5.522,33.923 ; 7.05,53.465 9.3,53.465 9.36,53.404 9.43,53.334 9.963,52.801 11.894,52.801 11.953,52.801 ; 11.552,105.753 12.55,106.751 13.498,106.751 14.45,107.703 14.45,108.251 14.9,108.701 14.9,109.001 14.9,109.251 ; 14,90.201 13.453,89.654 13.453,81.822 14.138,81.137 15.63,81.137 ; 14,92.701 15.227,91.474 18.557,91.474 19.807,90.224 ; v3(15.004,76.27) 15.63,76.897 15.63,77.327 16.748,77.327 17.104,76.97 18.304,76.97 19.055,77.721 19.055,83.722 17.83,84.947 15.63,84.947 ; 15.252,28.264 17.459,26.058 29.368,26.058 29.518,26.208 ; 15.252,30.804 19.328,30.804 20.025,31.501 26.775,31.501 28.25,30.026 30.779,30.026 32.058,28.748 ; 15.252,33.344 14.673,33.923 5.522,33.923 ; 15.63,78.597 17.428,78.597 v3(17.904,78.121) ; 15.63,79.867 15.634,79.871 v3(17.954,79.871) ; 15.63,86.217 15.63,87.099 v3(15.854,87.323) 18.054,87.323 18.455,86.923 20.005,86.923 20.605,87.523 20.605,88.473 21.305,89.174 21.305,91.226 19.807,92.724 ; 15.654,82.372 v3(17.904,82.372) ; 16.5,90.201 18.578,88.123 v3(19.255,88.123) ; 17.802,34.614 26.361,34.614 v3(26.557,34.81) ; v3(18.555,23.257) 18.605,23.307 28.757,23.307 31.658,26.208 32.058,26.208 ; 19.255,71.569 20.255,71.569 20.875,70.95 23.436,70.95 23.906,71.419 25.006,71.419 26.106,70.319 26.106,67.168 27.525,65.75 29.261,65.75 ; 19.305,68.768 19.536,69 23.825,69 v3(24.356,68.468) ; 22.461,70.3 24.337,70.3 v3@24.356,70.319 ; 22.461,71.6 21.325,71.6 20.505,72.419 20.505,74.07 21.755,75.32 21.755,80.871 22.756,81.872 22.756,86.923 23.506,87.673 33.508,87.673 33.508,87.723 ; 22.461,72.25 21.475,72.25 21.055,72.669 21.055,73.82 22.456,75.22 22.456,79.921 23.671,81.137 24.88,81.137 ; 22.461,72.9 22.461,74.325 23.056,74.92 23.056,79.371 23.551,79.867 24.88,79.867 ; 22.499,32.871 22.505,32.871 ; 22.5,31.501 22.5,32.901 ; 22.506,26.058 22.512,26.051 22.512,24.645 ; 24.88,77.327 28.301,77.327 29.707,75.92 ; 24.88,82.407 25.991,82.407 v3(27.207,83.622) ; 24.88,84.947 28.833,84.947 v3@28.857,84.922 ; 25.4,24.67 25.4,23.314 25.406,23.307 ; 25.4,34.614 25.413,34.601 25.413,32.897 ; v3(26.4,41.401) 27.257,40.545 29.388,40.545 ; v3(26.7,43.701) 26.857,43.545 29.388,43.545 ; v3(27.057,90.224) 28.807,90.224 ; v3@27.557,71.219 v3(27.607,71.219) ; v3@27.707,68.368 27.726,68.35 29.261,68.35 ; 28.807,92.724 32.809,92.724 33.515,92.018 33.515,90.461 ; 28.957,78.871 29.857,78.871 31.858,76.87 33.358,76.87 v3(33.358,76.27) ; 29.207,71.619 28.007,71.619 v3(27.607,71.219) ; 29.261,64.45 36.491,64.45 38.109,66.068 38.109,67.968 ; 29.261,65.1 34.291,65.1 35.509,66.318 35.509,67.918 ; 29.261,66.4 30.926,66.4 v3@31.258,66.068 ; 29.261,67.7 32.69,67.7 32.958,67.968 ; 29.261,70.95 27.876,70.95 v3(27.607,71.219) ; 29.518,33.828 30.8,35.11 30.8,42.051 32.188,43.439 32.188,43.545 ; 29.695,75.814 30.823,74.685 31.058,74.45 31.058,67.718 ; v3@30.858,74.72 v3(31.258,75.12) ; 31.75,105.678 31.75,107.028 ; 32.058,33.828 33.925,35.695 33.925,38.826 32.197,40.554 32.175,40.576 ; 32.902,70.781 32.908,70.788 v3(32.908,71.619) ; 33.38,77.701 37.329,77.701 v3(38.109,76.92) ; 33.38,78.501 39.14,78.501 v3@39.16,78.521 ; 34.25,105.478 34.25,106.97 34.259,106.978 ; 35.502,70.781 35.509,70.788 v3(35.509,71.619) ; 38.103,70.781 38.103,71.512 v3(38.109,71.519) ; v1(41.75,42.651) 41.807,42.708 44.062,42.708 ; v1(41.75,54.001) 64.4,54.001 67.1,56.701 81.7,56.701 v1(81.75,56.651) ; v1(68.35,42.901) 68.4,42.851 70.05,42.851 71.9,44.701 74.55,44.701 76.35,42.901 76.35,42.653 76.35,42.601 ; v1(68.4,47.901) 86.15,47.901 v1(87.2,48.951) ; 78.55,41.701 78.575,41.676 79.125,41.126 79.125,38.301 ; 78.6,43.651 78.625,43.626 78.7,43.551 v1(84.3,43.551) ; 78.602,41.703 78.649,41.703 ; v1@79.17,39.961 79.93,39.961 80.737,40.768 82.81,40.768 ; v1(81.15,34.751) 81.275,34.876 81.275,36.401 ; 81.25,38.351 81.275,38.326 81.275,38.301 82.25,38.301 83.25,37.301 83.25,34.651 82,33.401 82,31.758 82,31.751 82.003,31.748 82.8,30.951 v1(87,30.951)
  Top Layer w0.4: 9.36,53.404 9.711,53.756 9.711,56.43 ; v1(9.752,110.579) 11.472,110.579 12.075,109.976 12.1,109.951 12.155,109.896 ; 11.552,105.699 11.552,105.753 ; 14.094,51.872 16.611,51.872 16.681,51.941 16.704,51.964 ; 19.185,51.937 20.278,51.937 21.054,52.714 22.694,52.714 ; 25.494,52.714 38.659,52.714 41.11,55.165 64.216,55.165 66.652,57.601 80.635,57.601 80.9,57.866 86.15,57.866 v1(86.25,57.766) ; v1(31.75,103.451) 31.75,105.678 ; 31.75,107.028 31.75,107.541 33.05,108.841 ; v1(34.25,102.651) 34.25,105.478 ; 34.259,106.978 34.259,107.51 35.59,108.841 ; 43.19,108.841 43.21,108.841 ; 43.2,108.831 43.21,108.841 ; 45.593,100.132 45.593,107.758 44.51,108.841 43.21,108.841 ; 48.133,100.132 48.133,107.834 v1(48.15,107.851) ; v1(50.45,106.201) 50.673,105.978 50.673,100.132 50.654,100.151 50.6,100.151
  Top Layer w0.5: 12.549,107.603 12.549,107.899 12.549,109.503 ; 13.499,105.403 13.499,105.003 17.653,100.848 17.653,100.132 ; 14.9,109.001 17.4,109.001 ; 14.9,109.251 14.9,110.001 ; 17.4,106.201 19.2,104.401 20.99,104.401 22.89,106.301 ; 17.802,37.154 18.149,37.501 21.35,37.501 21.35,36.176 21.975,35.551 25.15,35.551 25.7,36.101 27.225,36.101 27.825,35.501 27.825,33.076 28.35,32.551 30.794,32.551 32.058,31.288 ; 20.193,100.132 20.193,101.144 25.35,106.301 25.43,106.301 ; v1@21.6,110.551 23.72,110.551 25.43,108.841 ; 22.499,30.071 22.499,27.458 22.512,27.445 ; 22.733,100.132 22.733,100.934 27.97,106.171 27.97,106.301 ; v3(24,39.201) 24.15,39.051 24.15,37.501 ; 25.273,100.132 25.273,100.624 30.51,105.861 30.51,106.301 ; 25.4,27.47 25.413,27.483 25.413,30.097 ; 32.893,100.132 33.05,100.289 33.05,106.301 ; 35.433,100.132 35.433,106.144 35.59,106.301 ; 37.973,100.132 38.13,100.289 38.13,106.301 ; 40.513,100.132 40.67,100.289 40.67,106.301 ; 43.053,100.132 43.21,100.289 43.21,106.301 ; 45.7,38.201 45.78,38.121 ; v1(46.85,40.851) 46.85,42.651 ; 46.862,45.808 53.144,45.808 v1(53.15,45.801) ; 46.862,48.908 47.019,48.751 51.1,48.751 63.52,48.751 63.6,48.831 ; 51.15,34.401 v1(53.45,34.401) 63.57,34.401 63.65,34.481 ; 72.809,50.102 78.809,50.102 80.509,50.102 81.17,50.764 ; 72.95,42.751 72.95,42.708 72.95,40.501 v1(73.05,40.401) ; v1(80.57,48.863) 80.582,48.851 83.5,48.851 84.3,49.651 84.3,49.664 84.3,52.204 84.3,52.241 ; v1@80.72,55.715 80.77,55.66 81.938,54.364 81.938,53.806 ; 81.338,50.956 81.338,51.039 82.9,52.601 82.9,53.381 84.292,54.773 84.3,54.781
  Top Layer w0.6: 46.8,51.701 60.75,51.701 v1(61.05,52.001)
  Top Layer w1: v1(58.25,110.301) 58.293,110.258 v1(58.293,107.901) 58.293,100.132
  Bottom Layer w0.25: v1(2.25,48.951) 1.8,49.401 1.8,100.201 2.7,101.101 v1(3.15,101.101)
  Bottom Layer w0.3: v3(1.675,101.426) 1.275,101.026 1.275,47.651 v3(1.925,47.001) ; 2.4,53.214 2.4,56.415 v1@2.4,56.465 ; v1(2.75,95.601) 2.4,95.251 v1@2.4,56.465 ; v1(2.786,56.415) 2.751,56.415 2.701,56.465 v1@2.4,56.465 ; v3(4.002,42.628) 4.002,45.156 6.747,47.901 22.225,47.901 26.425,43.701 v3(26.7,43.701) ; v3(5.325,44.126) 5.325,45.376 6.45,46.501 22.275,46.501 25.1,43.676 25.1,42.701 v3(26.4,41.401) ; 14,64.201 14,75.267 v3(15.004,76.27) ; v3(15.854,87.323) 16.5,86.677 16.5,64.201 ; 16.5,92.701 17.954,91.247 17.954,82.422 v3(17.904,82.372) ; 16.504,78.621 17.404,78.621 v3(17.904,78.121) ; 17.802,29.534 17.802,24.009 v3(18.555,23.257) ; v3(17.954,79.871) 19.105,81.021 19.105,87.973 v3(19.255,88.123) ; v3(24.456,70.269) 24.456,81.672 26.407,83.622 v3(27.207,83.622) ; v3(26.557,34.81) 26.557,34.62 28.625,32.551 30.05,32.551 30.75,31.851 30.75,29.98 29.518,28.748 ; v3(27.057,90.224) 27.057,87.151 28.857,85.351 28.857,77.871 31.258,75.47 v3(31.258,75.12) ; v3@27.557,71.219 v3(27.607,71.219) ; 27.97,108.841 29.25,107.561 29.25,102.801 29.1,102.651 29.1,97.901 29.7,97.301 79.1,97.301 79.95,96.451 79.95,60.651 80.6,60.001 80.6,55.701 80.653,55.648 80.67,55.665 v1@80.72,55.715 ; v3(32.908,71.619) 32.908,71.719 33.358,72.169 v3(33.358,76.27) ; v3(35.509,71.619) 38.109,74.22 v3(38.109,76.92) ; v3(38.109,71.519) 39.16,72.569 v3@39.16,78.521 ; 38.13,108.841 39.4,107.571 39.4,105.651 40.15,104.901 49.15,104.901 v1(50.45,106.201) ; 40.6,108.851 40.61,108.841 40.67,108.841 41.933,107.578 47.877,107.578 v1(48.15,107.851) ; v1(41.75,42.651) v1(41.75,54.001) ; 43.15,106.351 43.2,106.301 43.21,106.301 48.65,106.301 49.85,107.501 51.15,107.501 51.9,106.751 64.8,106.751 70.8,100.751 79.4,100.751 80.75,102.101 85.6,102.101 86.15,101.551 86.15,69.751 ; 43.21,108.841 43.47,109.101 64.95,109.101 71.85,102.201 78.8,102.201 80.3,103.701 86.45,103.701 87.45,102.701 87.7,102.451 87.699,49.451 v1(87.2,48.951) ; v1(58.293,107.901) 64.6,107.901 71.1,101.401 79,101.401 80.3,102.701 86.05,102.701 87,101.751 87,50.801 86.1,49.901 86.1,47.201 87.4,45.901 87.4,31.151 87.2,31.151 v1(87,30.951) ; v1(68.35,42.901) 68.4,42.951 v1(68.4,47.901) ; 80.85,64.451 80.85,60.901 81.75,60.001 v1(81.75,56.651) ; v1(81.15,34.751) 82.95,34.751 84.3,36.101 v1(84.3,43.551)
  Bottom Layer w0.4: 2.45,53.214 2.45,50.713 3.45,49.714 3.45,49.014 v1(4.001,48.463) ; v1(31.75,103.451) 32.35,104.051 51.834,104.051 55.753,100.132 ; v1(34.25,102.651) 34.75,103.151 50.194,103.151 53.213,100.132 ; v1(86.25,57.766) 86.872,57.766 86.972,57.866
  Bottom Layer w0.5: v1(9.752,110.579) 9.78,110.551 v1@21.6,110.551 ; 15.252,33.344 16.07,32.526 17.35,32.526 17.802,32.074 21.125,28.751 v3(25.4,28.751) 25.413,28.738 v3@25.413,28.701 ; 23.975,28.751 23.975,39.176 v3(24,39.201) ; v3@25.413,28.751 27.2,28.751 27.95,29.501 27.95,30.301 28.936,31.288 29.518,31.288 ; 45.78,25.701 45.78,38.201 45.78,38.931 46.85,40.001 v1(46.85,40.851) ; v1(53.15,45.801) 53.45,45.501 v1(53.45,34.401) ; 59.98,11.501 59.9,11.581 59.9,24.001 59.9,50.851 v1(61.05,52.001) ; v1(73.05,40.401) 74.05,39.401 74.05,38.301 74.05,25.801 ; v1(79.125,39.901) 79.125,47.418 v1(80.57,48.863)
  Bottom Layer w0.6: 54.9,11.501 54.9,24.001 54.9,24.006
  Bottom Layer w1: 15.113,100.132 15.113,100.714 16.75,102.351 19.4,102.351 22.89,105.841 22.89,106.301 22.89,108.841 22.89,109.641 23.8,110.551 58,110.551 v1(58.25,110.301)
  other v1: 5.451,50.464 70.518,50.464 68.017,52.914 35.509,55.401 30.55,55.415 15.504,55.465 20.45,55.465 25.506,55.501 80.72,55.615 50.45,56.615 60.45,56.615 55.514,56.665 40.51,56.701 45.511,56.765 28.007,57.901 48.062,57.901 58.014,57.901 18.004,57.966 23.006,57.966 33.008,57.966 38.009,57.966 43.011,57.966 53.013,57.966 63.016,57.966 8.102,58.666 8.002,62.967 83.021,69.769 83.021,74.801 83.021,79.901 83.021,84.901 83.05,89.924 5.501,90.474 8.002,92.901 83.021,94.801 70.518,99.026 75.519,99.026 66.017,99.901 63.166,102.301 56.214,102.801 11.903,103.227 16.904,104.301 60.35,104.727 53.55,104.877 83.021,105.428 80.47,107.978 85.471,107.978 67.667,108.501 65.216,110.401 69.968,110.429 78.02,110.429 83.021,110.429 21.6,110.501 60.465,110.501
  other v2: 12.503,2.501 17.504,2.501 22.506,2.501 27.457,2.501 32.508,2.501 37.509,2.501 42.511,2.501 47.512,2.501 52.463,2.501 57.514,2.501 62.466,2.501 67.467,2.501 82.471,2.501 40.01,5.001 45.011,5.001 50.013,5.001 55.014,5.001 64.966,5.001 79.97,5.001 84.971,5.001 15.004,5.051 20.005,5.051 25.006,5.051 30.008,5.051 37.509,7.502 42.511,7.502 47.512,7.502 52.463,7.502 57.514,7.502 62.466,7.502 67.467,7.502 82.471,7.502 12.503,7.552 17.504,7.552 22.506,7.552 27.457,7.552 32.508,7.552 39.96,10.003 44.961,10.003 49.963,10.003 54.964,10.003 65.016,10.003 70.018,10.003 75.019,10.003 80.02,10.003 84.971,10.003 37.459,12.503 42.461,12.503 47.462,12.503 52.413,12.503 57.464,12.503 62.516,12.503 67.517,12.503 72.518,12.503 77.47,12.503 82.521,12.503 40.01,14.954 45.011,14.954 50.013,14.954 55.014,14.954 65.066,15.004 70.068,15.004 75.069,15.004 80.07,15.004 84.971,15.004 37.509,17.454 42.511,17.454 47.512,17.454 52.463,17.454 57.514,17.454 62.566,17.504 67.567,17.504 72.568,17.504 77.52,17.504 82.571,17.504 84.971,19.955 40.01,20.005 45.011,20.005 50.013,20.005 55.014,20.005 65.016,20.005 70.018,20.005 75.019,20.005 80.02,20.005 37.509,22.506 42.511,22.506 47.512,22.506 52.463,22.506 57.514,22.506 62.516,22.506 67.517,22.506 72.518,22.506 77.47,22.506 82.521,22.506 84.971,25.006 8.002,67.867 5.501,70.368 8.002,72.918 5.501,75.369 8.002,77.87 5.501,80.37 8.002,82.871 5.501,85.372 8.002,87.872
  other v3: 22.5,28.751 31.097,66.318 27.557,68.368 38.96,78.671 28.857,84.972
  other v4: 89.95,6.751 89.924,6.8 89.95,8.751 89.924,8.8 36.15,61.801 38.15,61.801 36.15,95.051 38.15,95.051 89.95,103.201 89.874,103.25 89.95,105.201 89.874,105.25
  other v5: 26.657,73.019 35.759,74.12 26.997,78.771

## Polygon pours and split planes (outlines as drawn)
no net on Top Layer (hatched 90Degree grid 0.1 track 0.3, remove dead copper): -1.25,113.876 -1.25,46.063 35.2,46.063 35.2,18.201 -3.75,18.201 -3.75,-2.074 92.05,-2.074 92.05,114.101 -1.25,114.101
no net on Top Layer (hatched 90Degree grid 0.1 track 0.3, remove dead copper): 22.556,90.971 22.556,76.621 20.655,74.797 20.605,74.749 20.605,63.567 40.56,63.567 40.56,93.275 22.556,93.275
GND on Top Layer (hatched 90Degree grid 0.1 track 0.3, remove dead copper): 89.022,114.028 89.022,-1.001 180.896,-1.001 180.896,114.128 89.022,114.128
+3V3 on Top Layer (hatched 90Degree grid 0.1 track 0.3, remove dead copper): 103.652,58.585 103.652,55.735 108.802,50.585 111.652,50.585 116.902,55.835 116.902,58.685 112.002,63.585 108.452,63.585 103.652,58.785
GND on Top Layer (hatched 90Degree grid 0.1 track 0.3, remove dead copper): 103.172,55.537 108.603,50.105 111.851,50.105 117.382,55.637 117.382,58.884 112.201,64.065 108.253,64.065 103.172,58.984
no net on Bottom Layer (hatched 90Degree grid 0.1 track 0.3, remove dead copper): -1.55,113.951 -1.55,49.751 35.125,49.751 35.125,18.501 -2.45,18.501 -2.45,-2.674 90.825,-2.674 90.825,113.701 -1.625,113.701
no net on Bottom Layer (hatched 90Degree grid 0.1 track 0.3, remove dead copper): 40.86,63.567 20.605,63.567 20.605,74.277 22.556,76.093 22.556,93.275 40.81,93.275 40.81,63.614
GND on Bottom Layer (hatched 90Degree grid 0.1 track 0.3, remove dead copper): 89.723,113.978 89.723,-1.452 180.846,-1.452 180.846,113.677 89.723,113.677
+3V3 on Bottom Layer (hatched 90Degree grid 0.1 track 0.3, remove dead copper): 108.824,73.55 112.324,73.55 122.324,83.55 122.324,86.7 112.274,96.75 108.974,96.75 99.024,86.8 99.024,83.2 108.624,73.6

## Keep-outs
Keep-Out Layer:
  circle w0.25: c11.8,121.251 r0
  circle w0.25: c11.8,121.251 r0
  circle w0.25: c11.8,121.251 r0
  circle w0.25: c11.8,121.251 r0
  circle w0.25: c11.8,121.251 r0
  circle w0.25: c11.8,121.251 r0
  circle w0.25: c11.8,121.251 r0
  circle w0.25: c11.8,121.251 r0
  circle w0.25: c12.674,121.3 r0
  circle w0.25: c12.674,121.3 r0
  circle w0.25: c12.674,121.3 r0
  circle w0.25: c12.674,121.3 r0
  circle w0.25: c12.674,121.3 r0
  circle w0.25: c12.674,121.3 r0
  circle w0.25: c12.674,121.3 r0
  circle w0.25: c12.674,121.3 r0
  lines w0.25: 10.3,60.851 10.35,60.801 ; 10.3,95.401 10.3,96.051 ; 10.3,95.551 10.3,60.801 34.1,60.801 ; 10.35,96.051 34.05,96.051 ; 12.3,62.801 34.35,62.801 ; 12.3,62.901 12.3,64.151 ; 12.3,63.151 12.3,94.051 ; 12.35,94.051 34.2,94.051 ; 18,20.501 33.75,20.501 33.75,10.501 2.25,10.501 2.25,20.501 18.05,20.501 ; 34.098,62.81 cw(c34.05,61.851) 34.103,60.892 ; 34.098,96.01 cw(c34.05,95.051) 34.103,94.092 ; 40,62.801 40.7,62.801 40.7,94.001 ; 40.147,62.81 ccw(c40.2,61.851) 40.152,60.892 ; 40.147,96.01 ccw(c40.2,95.051) 40.152,94.092 ; 40.2,60.801 78.85,60.801 78.85,96.051 40.3,96.051 ; 40.3,94.051 40.7,94.051 ; 78.8,60.801 78.85,60.851 ; 88.965,4.798 cw(c89.924,4.75) 90.883,4.803 ; 88.965,10.847 ccw(c89.924,10.9) 90.883,10.852 ; 88.965,101.199 cw(c89.924,101.151) 90.883,101.204 ; 88.965,107.248 ccw(c89.924,107.301) 90.883,107.253 ; 89,4.95 89,0 0,0 0,112.45 89,112.45 ; 89,10.701 89,101.501 ; 89,107.2 89,112.401 ; 90.824,5 90.824,0 179.824,0 179.824,112.45 90.824,112.45 90.824,107.2 ; 90.824,10.6 90.824,101.3 ; 40.3,96.051 40.3,96.051 ; 41.96,96.051 41.96,96.051

## Silkscreen, mask and mechanical layers (free items; w line width, h text height)
Mechanical 3:
  lines w0.254: 38.045,95.797 38.05,95.801
Mechanical 5:
  circle w0.254: c121.071,9.401 r0.4
  circle w0.254: c100.775,8.901 r0.3
  circle w0.254: c101.472,2.199 r0.3
  circle w0.254: c103.572,4.7 r0.3
  circle w0.254: c106.027,2.199 r0.304
  circle w0.254: c116.529,2.199 r0.3
  circle w0.254: c111.128,8.001 r0.3
  circle w0.254: c111.128,2.95 r0.305
  circle w0.254: c105.801,6.752 r0.352
  circle w0.254: c105,8.002 r0.252
  circle w0.254: c103.35,9.202 r0.311
  circle w0.254: c120.054,11.909 r0.409
  circle w0.254: c120.054,6.909 r0.36
  lines w0.2: 104.026,-0.001 121.481,-0.001 121.531,-0.051

## Text inside footprints (layer, text, board x,y; h text height)
JP5: Top Overlay "2" at 17.81,108.333 h1; Top Overlay "1" at 17.81,105.793 h1; Top Overlay "19" at 44.734,105.793 h1; Top Overlay "20" at 44.734,108.333 h1
JP6: Top Overlay "2" at 108.634,108.332 h1; Top Overlay "1" at 108.634,105.792 h1; Top Overlay "19" at 135.558,105.792 h1; Top Overlay "20" at 135.558,108.332 h1
PBD10: Top Overlay "10" at 120.949,37.991 h1.27 r90; Top Overlay "9" at 123.489,37.991 h1.27 r90; Top Overlay "1" at 123.489,24.275 h1.27 r90; Top Overlay "2" at 120.949,23.767 h1.27 r90
PBD14: Top Overlay "2" at 149.101,4.468 h1 r180; Top Overlay "1" at 148.593,7.008 h1 r180; Top Overlay "9" at 134.877,7.008 h1 r180; Top Overlay "10" at 134.877,4.468 h1 r180
PLHD10: Bottom Overlay "2" at 30.026,23.668 h1.27 r90; Bottom Overlay "1" at 32.566,24.176 h1.27 r90; Bottom Overlay "9" at 32.566,37.892 h1.27 r90; Bottom Overlay "10" at 30.026,37.892 h1.27 r90